# Altium PCB cybd18V1.2.3F.PcbDoc
Units mil, origin at the board's own origin, x right, y up, seen from the top; angles counter-clockwise.
Board outline 2090.52 x 2175.68 mil, 2 copper layers (Top Layer, Bottom Layer); 93 components, 98 nets, 339 pads, 70 vias.
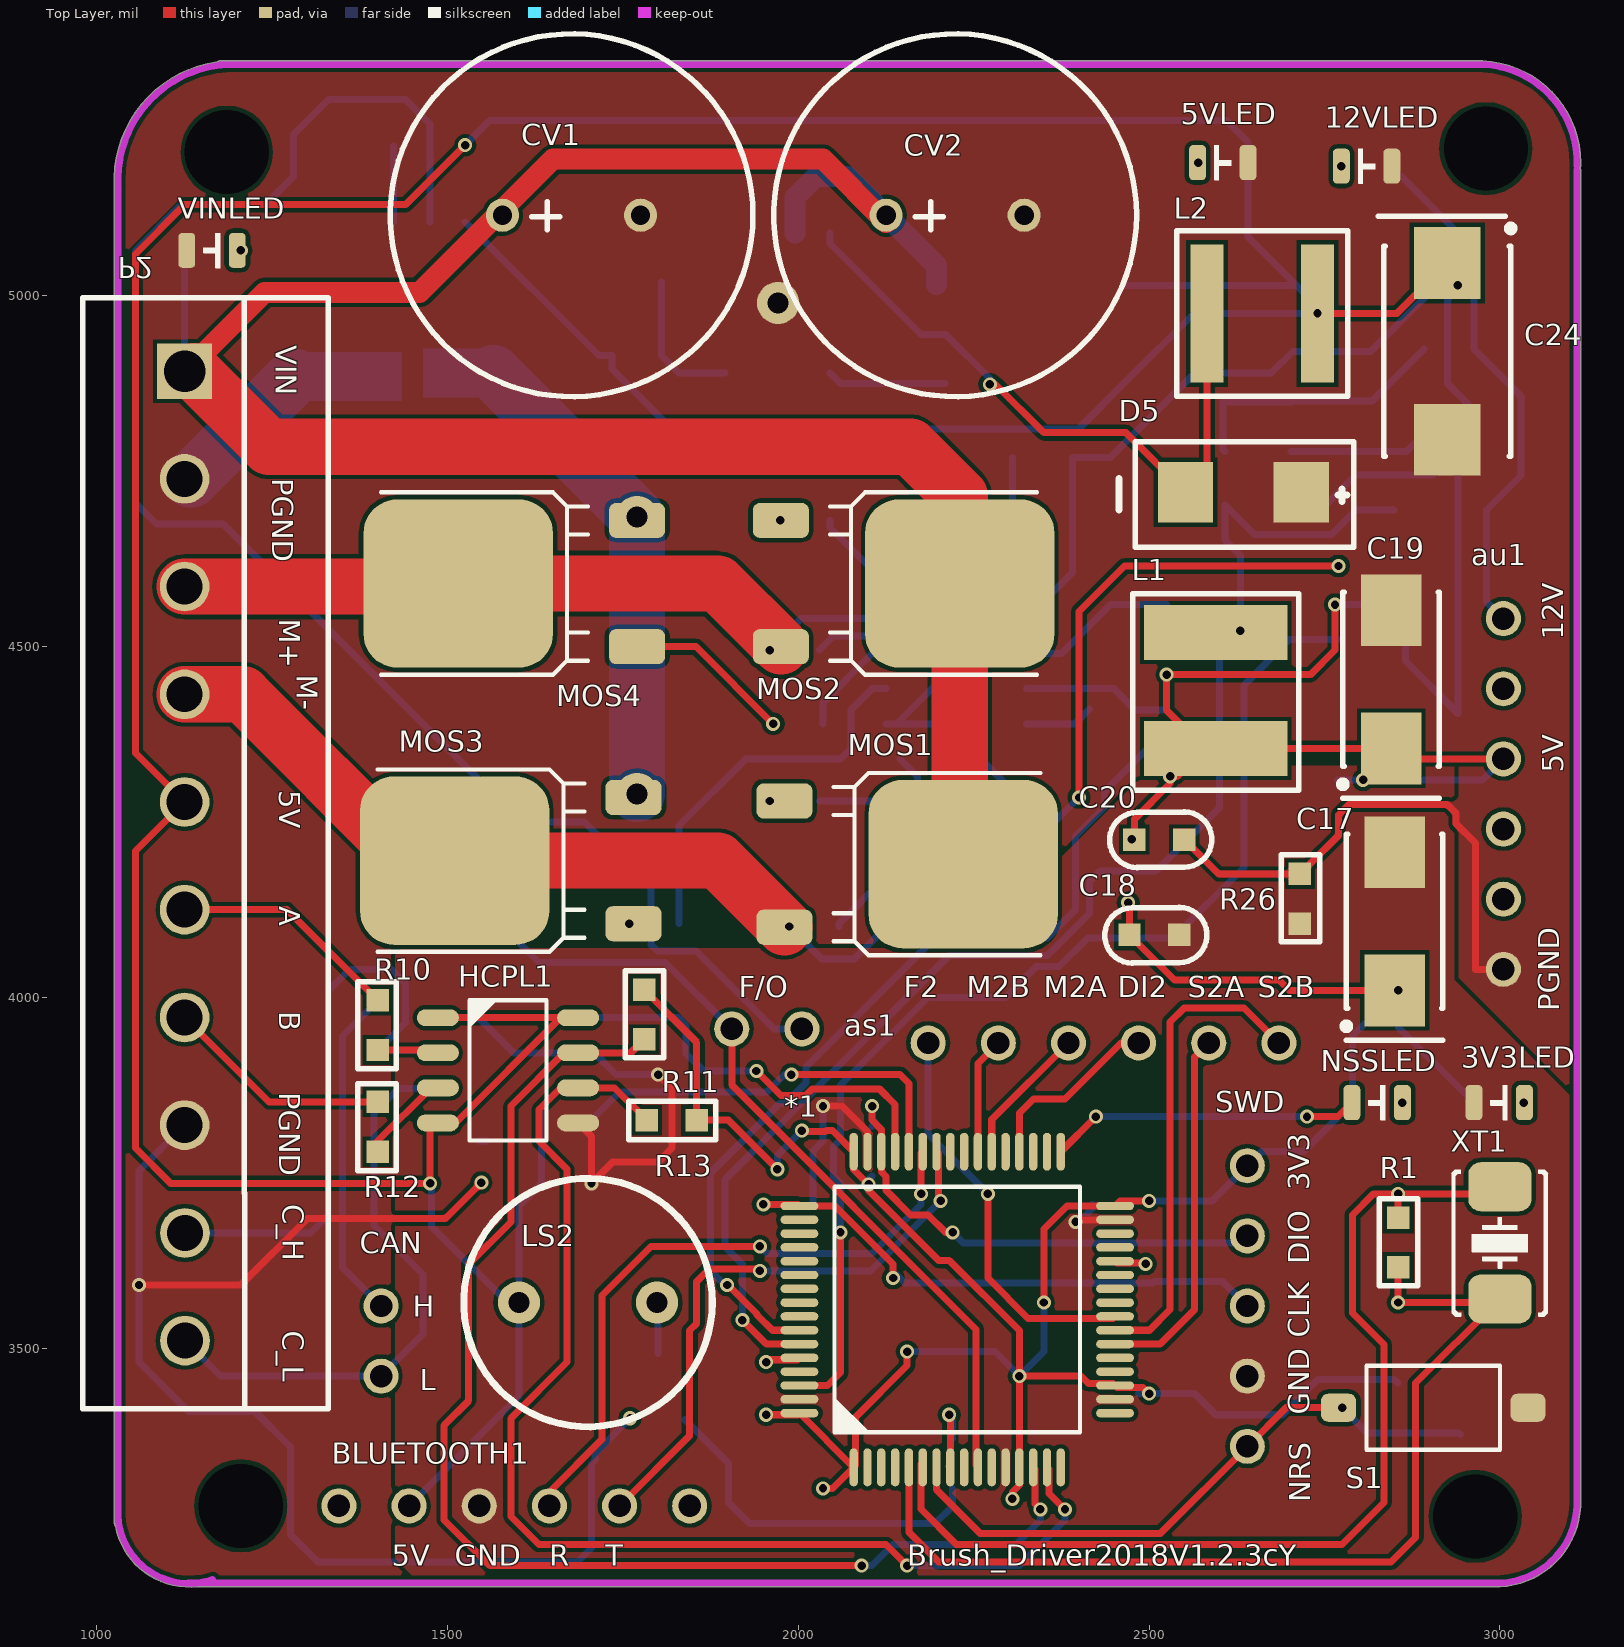
[diagram p0: Top Layer view]
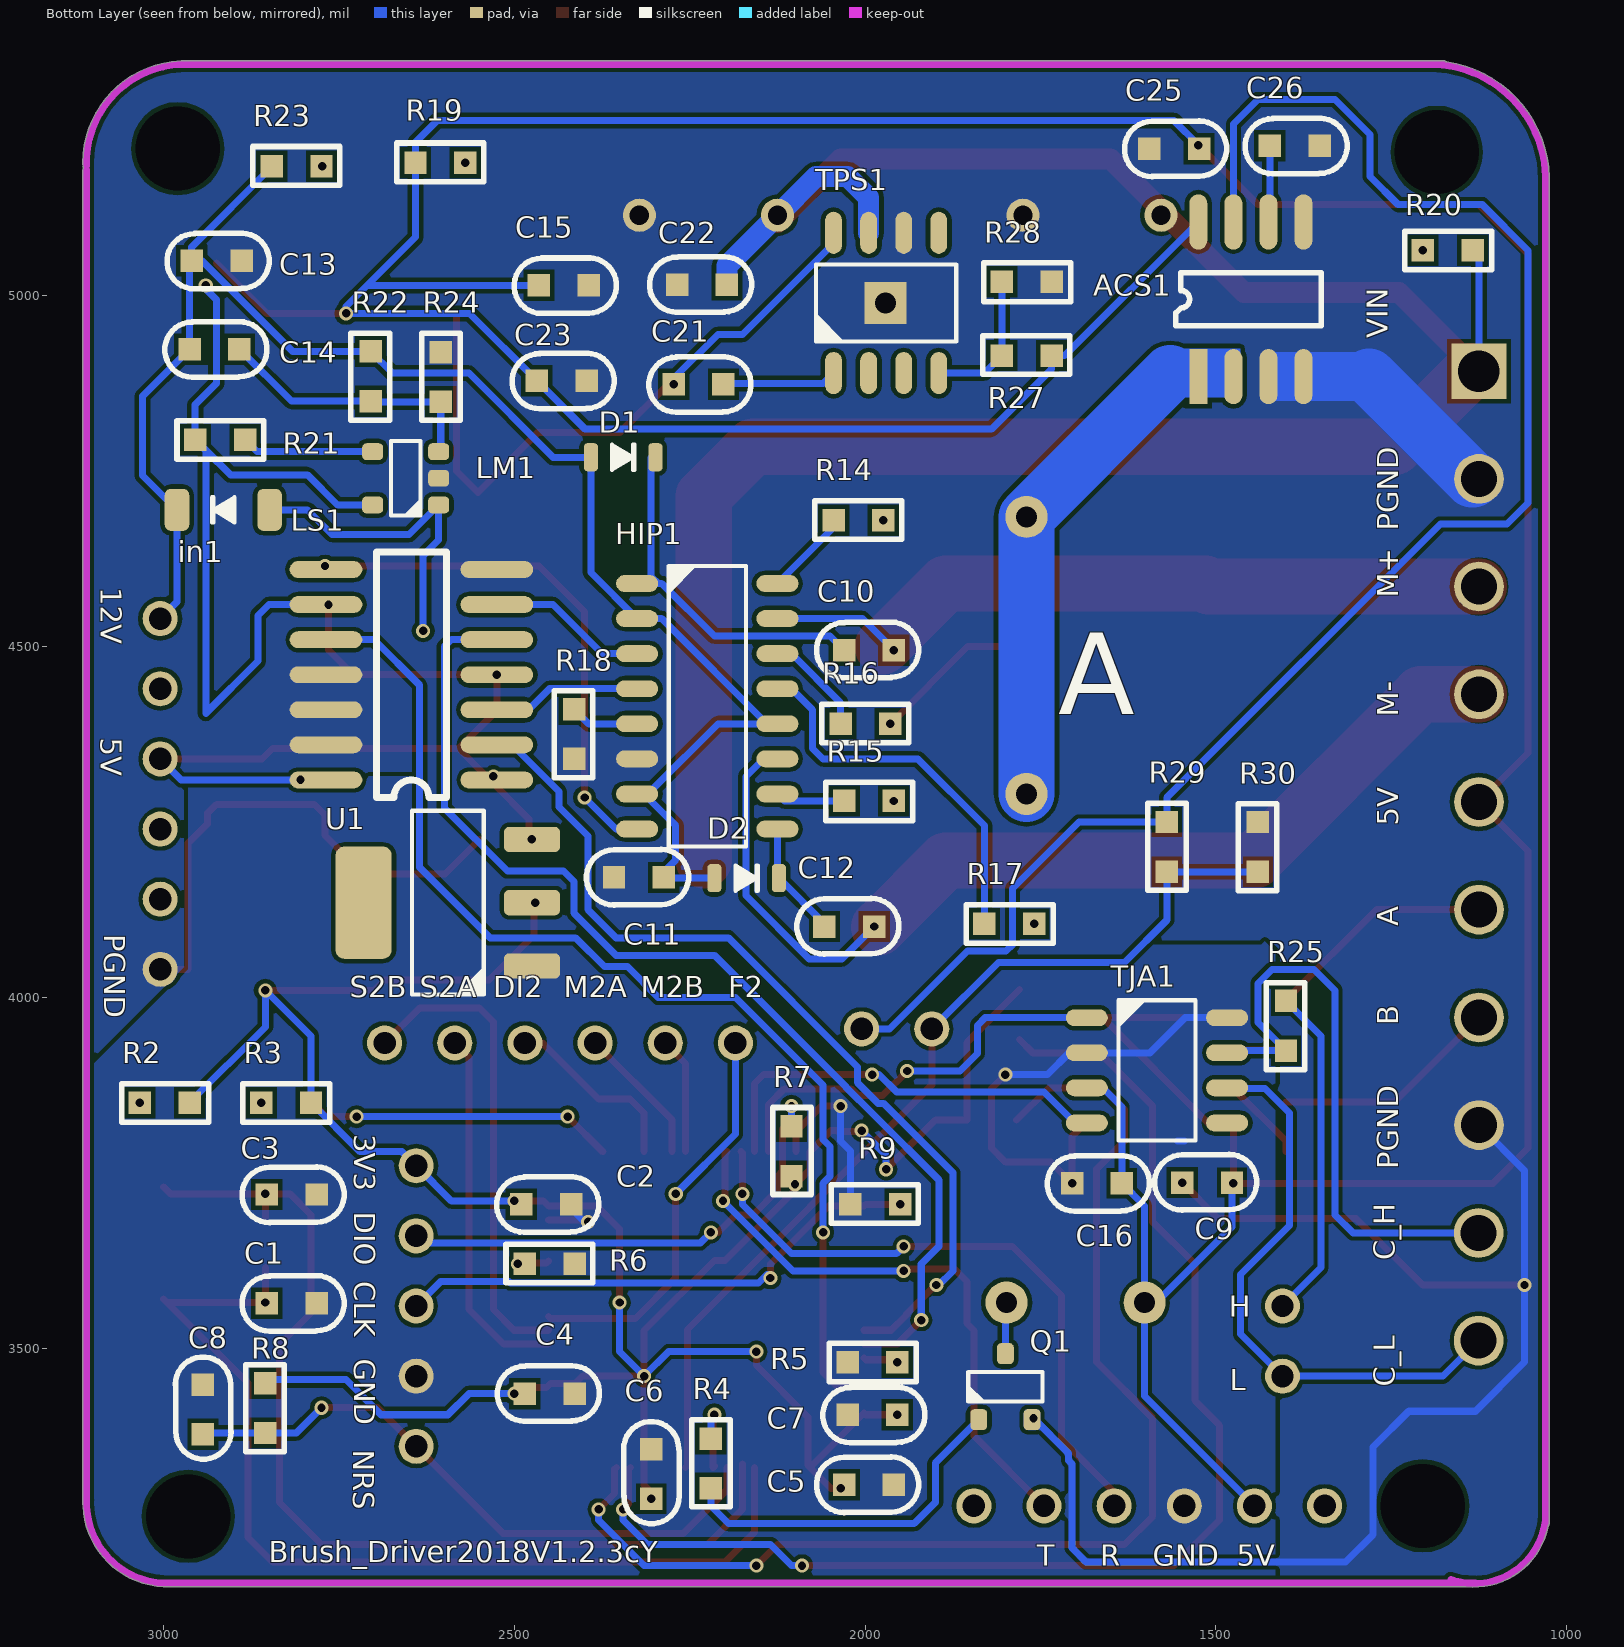
[diagram p1: Bottom Layer view, seen from below]
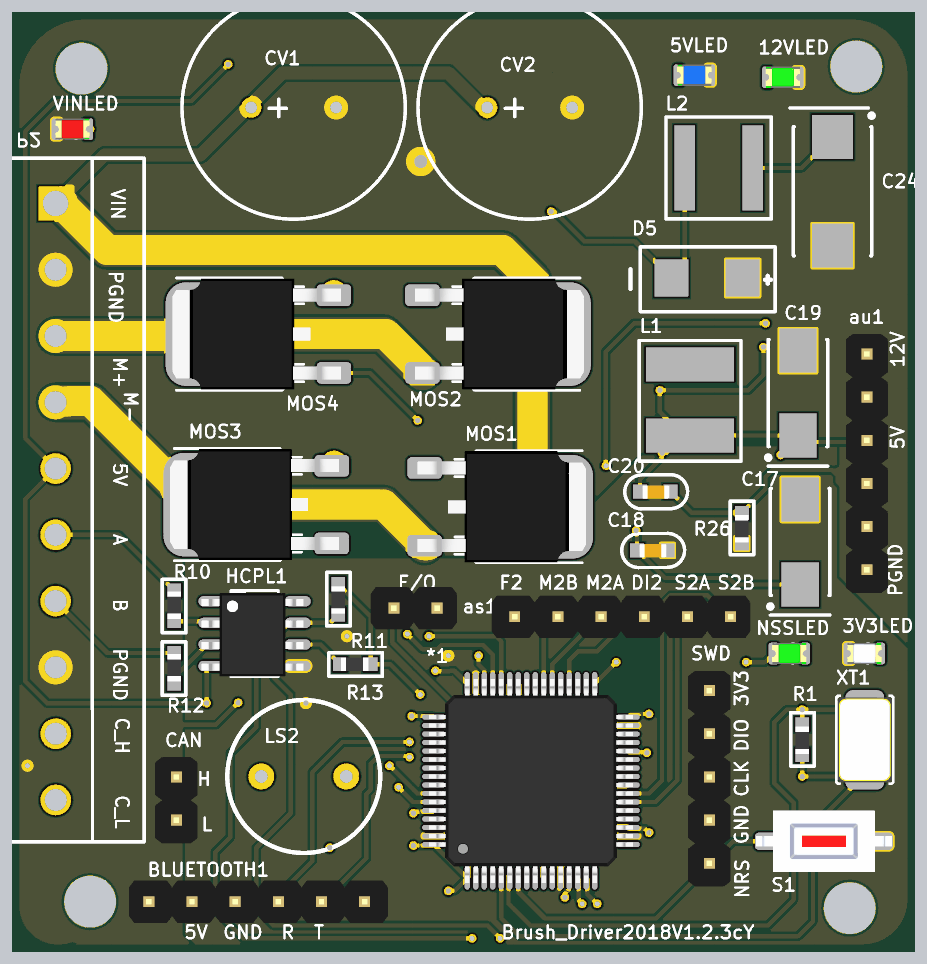
[diagram p2: 3D render of the assembled board from above, using the file's embedded part models]
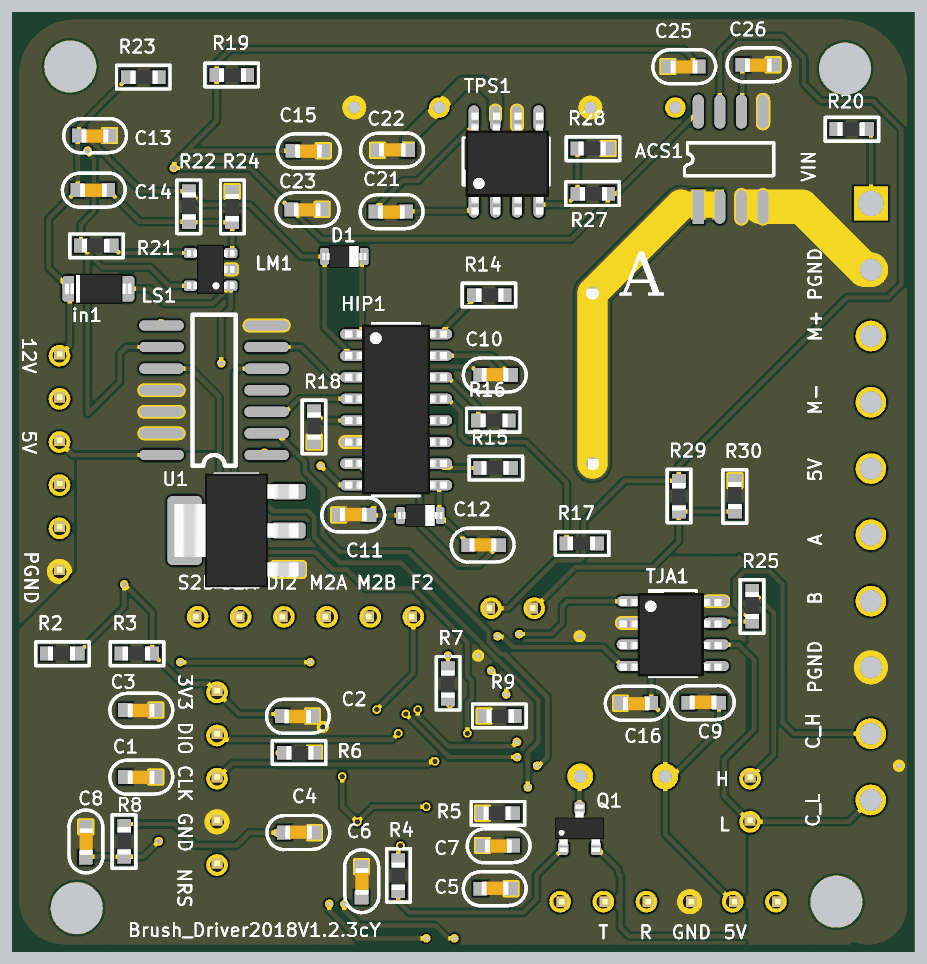
[diagram p3: 3D render of the assembled board from below, using the file's embedded part models]

## Layer stack, top to bottom
Top Solder: solder mask 0.4, Solder Resist, Dk 3.5
Top Layer: signal copper 1.4
Dielectric 1: dielectric 12.6, FR-4, Dk 4.8
Bottom Layer: signal copper 1.4
Bottom Solder: solder mask 0.4, Solder Resist, Dk 3.5

## Board outline
1026.45,3246.46 cw(c1030,3250) 1024.98,3250 1024.98,3257.24 cw(c1131.51,3266.23) 1024.98,3275.21 1024.98,5154.85 cw(c1195,5165) 1171.62,5333.71 cw(c1175,5330) 1175,5335.02 2975,5335.02 cw(c2975,5330) 2975.18,5335.01 cw(c2970,5190) 3115.1,5190 cw(c2970,5190) 3115.01,5184.82 cw(c3110,5185) 3114.35,5182.5 cw(c3110,5180) 3115.01,5180 3115.01,3285.11 cw(c2995,3280) 3115.12,3280 cw(c2995,3280) 3115.01,3274.78 cw(c2995,3280) 3000.22,3159.99 cw(c3000,3165) 3000,3159.99 1143.38,3159.99 cw(c1131.51,3266.23)

## Design rules (kind name [scope] priority, off if disabled: settings)
Clearance [All] p1: gap=6 ignorepadtopadclearanceinfootprint=FALSE
PolygonConnect [All] p1: connectstyle=Direct reliefconductorwidth=10 reliefentries=4 polygonreliefangle="90 Angle" airgapwidth=10
RoutingVias [All] p1: holewidth=12 width=20 viastyle="Through Hole" minholewidth=10 minwidth=20 maxholewidth=28 maxwidth=50
SolderMaskExpansion [All] p1: expansion=4
UnRoutedNet [All] p1: checkbadconnections=TRUE
Width [All] p1: maxlimit=100 minlimit=10 preferedwidth=10
29 further rules are at their usual default settings.

## Classes and differential pairs
component class 74ls08: LS1
component class cy18bd103: 3V3LED *1 BLUETOOTH BLUETOOTH1 C1 C2 C3 C4 C5 C6 C7 C8 LS2 NSSLED P1 Q1 R1 R2 R3 R4 R5 R6 R7 R8 R9 S1 SWD XT1
component class hcpl0630: C9 HCPL1 R10 R11 R12 R13
component class HIP4082driver: 5VLED as1 au1 C10 C11 C12 CV1 CV2 D1 D2 HIP1 MOS1 MOS2 MOS3 MOS4 P2 R14 R15 R16 R17 R18 R19 R20 VINLED
component class lm27313_5_12: 12VLED C13 C14 C15 in1 L1 LM1 R21 R22 R23 R24
component class taj1050: C16 CAN P3 R25 TJA1
component class tlv117_5_3.3: C17 C18 C19 C20 R26 U1
component class tps5430_VIN_5V: C21 C22 C23 C24 D5 L2 R27 R28 TPS1
component class 电流环: ACS1 C25 C26 C? F/O P?

## Components (designator, comment, footprint, x,y, rotation, side; value= is the part's Value field where it differs from the comment)
3V3LED "LED_0805blue" LED_0805_YELLOW 2999,3850 r180 top
5VLED "LED_0805" LED_0805_BLUE 2605,5190 r0 top
12VLED "LED_0805" LED_0805_GREEN 2810,5185 r0 top (schematic designator 2)
*1 "STM32F103RC" LQFP_P0.5_64 2226.42,3555 r90 top
ACS1 "ACS712" SOP8ACS712 1525,4885 r90 bottom
as1 "HDR1x6_2.54" HDR1X6_2.54_180 2685,3935 r270 top
au1 "HDR1x6_2.54" HDR1X6_2.54_180 3005,4540 r0 top
BLUETOOTH1 "HDR1x6_2.54" HDR1X6_2.54_180 1345,3275 r90 top
C1 "Cap_0603" CAP_0603 2815,3565 r0 bottom value=20pF
C2 "Cap_0603" CAP_0603 2452,3706 r0 bottom value=0.1uF
C3 "Cap_0603" CAP_0603 2815,3720 r0 bottom value=20pF
C4 "Cap_0603" CAP_0603 2452,3434 r180 bottom value=0.1uF
C5 "Cap_0603" CAP_0603 1997,3304 r180 bottom value=0.1uF
C6 "Cap_0603" CAP_0603 2306,3323 r270 bottom value=0.1uF
C7 "Cap_0603" CAP_0603 1987,3406 r0 bottom value=0.1uF
C8 "Cap_0603" CAP_0603 2945,3415 r270 bottom value=0.1uF
C9 "Cap_0603" CAP_0603 1515,3735 r180 bottom value=0.1uF
C10 "Cap_0603" CAP_0603 1997,4494 r180 bottom value=1uF
C11 "Cap_0603" CAP_0603 2325,4170 r180 bottom value=0.1uF
C12 "Cap_0603" CAP_0603 2025,4100 r180 bottom value=1uF
C13 "Cap_0603" CAP_0603 2922,5051 r0 bottom value=4.7uF
C14 "Cap_0603" CAP_0603 2925,4925 r0 bottom value=220pF
C15 "Cap_0603" CAP_0603 2427,5016 r0 bottom value=2.2uF
C16 "Cap_0603" CAP_0603 1667,3736 r0 bottom value=0.1uF
C17 "Cap_Tan_0805" CAP-TAN-6032/CAPC 2850,4010 r270 top value=100uF
C18 "Cap_0603" CAP_0603 2510,4090 r180 top value=0.1uF
C19 "Cap_Tan_0805" CAP-TAN-6032/CAPC 2845,4355 r270 top value=100uF
C20 "Cap_0603" CAP_0603 2517,4226 r180 top value=0.1uF
C21 "Cap_0603" CAP_0603 2235,4875 r0 bottom value=0.1uF
C22 "Cap_0603" CAP_0603 2235,5015 r180 bottom value=10uF
C23 "Cap_0603" CAP_0603 2430,4880 r0 bottom value=0.1uF
C24 "Cap_Tan_0805" CAP-TAN-7343/CAPD 2925,5046.97 r270 top value=220uF
C25 "Cap_0603" CAP_0603 1557,5211 r0 bottom value=0.1uF
C26 "Cap_0603" CAP_0603 1385,5215 r0 bottom value=1nF
CAN "HDR1x2_2.54" HDR1X2_2.54_180 1405,3560 r0 top (schematic designator P3)
CV1 "680uF" CAP_ELE_680UF0.7X5MM 1775,5115 r180 top value=*μF
CV2 "680uF" CAP_ELE_680UF0.7X5MM 2321.85,5115 r180 top value=*μF
D1 "Din5819" SOD-323 2345,4770 r180 bottom
D2 "Din5819" SOD-323 2169,4170 r180 bottom
D5 "dio_ss34" dio_ss34 2635,4720 r180 top
F/O "HDR1x2_2.54" HDR1X2_2.54_180 2005,3955 r270 top (schematic designator P4)
HCPL1 "HCPL0630" SOP_E150_8 1585,3895 r0 top
HIP1 "hip4082" SOP_E150_16 2225,4415 r180 bottom
in1 "SchottkyDiode_SOD123" SOD-123 2915,4695 r0 bottom value=B?
L1 "" indmm5x2_2_2 2595,4441.26 r90 top value=10uH
L2 "Ind_0603" indmm5x1.2x4x5 2661.26,4975 r0 top value=47H
LM1 "LM27313" SOT23-5 2655,4740 r0 bottom
LS1 "74LS08" SOP14 2536.81,4310 r0 bottom
LS2 "Bell" Bell-5.6-0.6-9mm 1700,3565 r0 top
MOS1 "MOSFET_N" TO-252AA 1980,4280 r270 top value=NMOS?
MOS2 "MOSFET_N" TO-252AA 1975,4680 r270 top value=NMOS?
MOS3 "MOSFET_N" TO-252AA 1765,4105 r90 top value=NMOS?
MOS4 "MOSFET_N" TO-252AA 1770,4500 r90 top value=NMOS?
NSSLED "LED_0805green" LED_0805_GREEN 2825,3850 r180 top
P2 "Header 10" Green_10P 1125,4885.63 r270 top
Q1 "BJT_NPN" SOT23-3 1800,3445 r90 bottom
R1 "Res_0603" RES_0603 2937,3649 r270 top value=1M
R2 "Res_0603" RES_0603 3000,3768 r0 bottom value=10K
R3 "Res_0603" RES_0603 2827,3768 r0 bottom value=10K
R4 "Res_0603" RES_0603 2138,3334 r270 bottom value=1K
R5 "Res_0603" RES_0603 1991,3398 r0 bottom value=10K
R6 "Res_0603" RES_0603 2448,3702 r180 bottom value=10K
R7 "Res_0603" RES_0603 2023,3779 r270 bottom value=10K
R8 "Res_0603" RES_0603 2937,3416 r90 bottom value=10K
R9 "Res_0603" RES_0603 1984,3787 r180 bottom value=10K
R10 "Res_0603" RES_0603 1318,3962 r90 top value=500
R11 "Res_0603" RES_0603 1862,3974 r270 top value=2k
R12 "Res_0603" RES_0603 1318,3817 r90 top value=500
R13 "Res_0603" RES_0603 1818,3743 r180 top value=2k
R14 "Res_0603" RES_0603 2008,4762 r180 bottom value=10K
R15 "Res_0603" RES_0603 1996,4198 r0 bottom value=10K
R16 "Res_0603" RES_0603 1998,4472 r180 bottom value=10K
R17 "Res_0603" RES_0603 1796,4023 r0 bottom value=10K
R18 "Res_0603" RES_0603 2497,4377 r90 bottom value=10K
R19 "Res_0603" RES_0603 2604,5272 r180 bottom value=10K
R20 "Res_0603" RES_0603 1171,4983 r0 bottom value=10K
R21 "Res_0603" RES_0603 2921,4713 r0 bottom value=10K
R22 "Res_0603" RES_0603 2787,4887 r90 bottom value=10K
R23 "Res_0603" RES_0603 2809,5267 r180 bottom value=10K
R24 "Res_0603" RES_0603 2523,4883 r270 bottom value=1K
R25 "Res_0603" RES_0603 1482,3961 r90 bottom value=120
R26 "Res_0603" RES_0603 2797,4139 r270 top value=0
R27 "Res_0603" RES_0603 1768,4997 r180 bottom value=10K
R28 "Res_0603" RES_0603 1771,4938 r0 bottom value=3.3K
R29 "Res_0603" RES_0603 1488,4213 r270 bottom value=10K
R30 "Res_0603" RES_0603 1522,4216 r90 bottom value=10K
S1 "ButtonTACT_3x6x2.5_180" ButtonTACT_3x6x2.5_180 2905,3415 r0 top
SWD "HDR1x5_2.54" HDR1X5_2.54_180 2640,3760 r0 top (schematic designator P1)
TJA1 "TJA1050" SOP_E150_8 1585,3895 r180 bottom
TPS1 "TPS5430" SOP_E150_9 1970,4990 r90 bottom
U1 "tlv1117-3.3" SOT223-3 2595,4135 r90 bottom
VINLED "LED_0805" LED_0805_RED 1164,5065 r180 top
XT1 "XTAL_32.768kHz" XT_5032_2 3000,3650 r270 top value=8M

## Footprints (in the part's own frame and the unit in brackets; to place one, negate y for a bottom-side part, rotate by r counter-clockwise, add the part's x,y. Pads: shape width x height; smd on the part's side, far side on the other; paste and mask are expansions set on the pad)
Bell-5.6-0.6-9mm [mil]
  round 60 hole 30: 1(-98.43,0) 2(98.43,0)
  silkscreen extent -177,-177 177,177
ButtonTACT_3x6x2.5_180 [mil]
  rrect50% 50x40 smd: 1(-135,0) 2(135,0)
  silkscreen extent -95,-60 95,60, body extent -157,-71 157,71, height 94
CAP-TAN-6032/CAPC [mm]
  rect 2.6x2.2 smd: 1(0,0) 2(-5,0)
  silkscreen extent -5.65,-1.87 1.8,1.75
CAP-TAN-7343/CAPD [mm]
  rect 2.6x2.4 smd: 1(0,0) 2(6.4,0)
  silkscreen extent -1.7,-2.5 7,2.43
CAP_0603 [mil]
  rect 32x32 smd: 1(-33,1) 2(38,1)
  silkscreen extent -72,-38 73,41, body extent -30,-14 33,18, height 31
CAP_ELE_680UF0.7X5MM [mm]
  round 1.2 hole 0.7: 1(5,0) 2(0,0)
  silkscreen extent -4.07,-6.57 9.07,6.57
dio_ss34 [mm]
  rect 2x2.2 smd: 1(-2.083,0) 2(2.108,0)
  silkscreen extent -3.99,-1.83 4.52,1.98
Green_10P [mm]
  rect 2x2 hole 1.5: 1(-0.18,0)
  round 1.8 hole 1.3: 2(3.72,0) 3(7.62,0) 4(11.52,0) 5(15.42,0) 6(19.32,0) 7(23.22,0) 8(27.12,0) 9(31.025,0.01) 10(34.925,0.01)
  silkscreen extent -2.85,-3.68 37.39,5.21
HDR1X2_2.54_180 [mil]
  round 50 hole 32: 1(0,0) 2(0,-100)
  body extent -49,-150 49,50, height 323
HDR1X5_2.54_180 [mil]
  round 50 hole 32: 1(0,0) 2(0,-100) 3(0,-200) 4(0,-300) 5(0,-400)
  body extent -49,-450 49,50, height 323
HDR1X6_2.54_180 [mil]
  round 50 hole 32: 1(0,0) 2(0,-100) 3(0,-200) 4(0,-300) 5(0,-400) 6(0,-500)
  body extent -49,-550 49,50, height 323
indmm5x1.2x4x5 [mm]
  rect 1.2x5 smd: 1(-2,0) 2(2,0)
  silkscreen extent -3.1,-3 3.1,3
indmm5x2_2_2 [mm]
  rect 2x5.2 smd: 1(-2.2,0) 2(2,0)
  silkscreen extent -3.7,-3 3.4,3
LED_0805_BLUE [mil]
  rrect50% 24x50 smd: 1(-36,0) 2(36,0)
  silkscreen extent -12,-24 12,24, body extent -40,-25 40,25, height 43
LED_0805_GREEN [mil]
  rrect50% 24x50 smd: 1(-36,0) 2(36,0)
  silkscreen extent -12,-24 12,24, body extent -40,-25 40,25, height 43
LED_0805_RED [mil]
  rrect50% 24x50 smd: 1(-36,0) 2(36,0)
  silkscreen extent -12,-24 12,24, body extent -40,-25 40,25, height 43
LED_0805_YELLOW [mil]
  rrect50% 24x50 smd: 1(-36,0) 2(36,0)
  silkscreen extent -12,-24 12,24, body extent -40,-25 40,25, height 43
LQFP_P0.5_64 [mil]
  oval 54x12 smd: 1(-225,147.64) 2(-225,127.95) 3(-225,108.27) 4(-225,88.58) 5(-225,68.9) 6(-225,49.21) 7(-225,29.53) 8(-225,9.84) 9(-225,-9.84) 10(-225,-29.53) 11(-225,-49.21) 12(-225,-68.9) 13(-225,-88.58) 14(-225,-108.27) 15(-225,-127.95) 16(-225,-147.64) 33(225,-147.64) 34(225,-127.95) 35(225,-108.27) 36(225,-88.58) 37(225,-68.9) 38(225,-49.21) 39(225,-29.53) 40(225,-9.84) 41(225,9.84) 42(225,29.53) 43(225,49.21) 44(225,68.9) 45(225,88.58) 46(225,108.27) 47(225,127.95) 48(225,147.64)
  oval 12x54 smd: 17(-147.64,-225) 18(-127.95,-225) 19(-108.27,-225) 20(-88.58,-225) 21(-68.9,-225) 22(-49.21,-225) 23(-29.53,-225) 24(-9.84,-225) 25(9.84,-225) 26(29.53,-225) 27(49.21,-225) 28(68.9,-225) 29(88.58,-225) 30(108.27,-225) 31(127.95,-225) 32(147.64,-225) 49(147.64,225) 50(127.95,225) 51(108.27,225) 52(88.58,225) 53(68.9,225) 54(49.21,225) 55(29.53,225) 56(9.84,225) 57(-9.84,225) 58(-29.53,225) 59(-49.21,225) 60(-68.9,225) 61(-88.58,225) 62(-108.27,225) 63(-127.95,225) 64(-147.64,225)
  silkscreen extent -175,-175 175,175, body extent -236,-236 236,236, height 59
RES_0603 [mil]
  rect 32x32 smd: 1(-37,-82) 2(34,-82)
  silkscreen extent -64,-109 60,-54, body extent -31,-98 31,-66, height 18
SOD-123 [mil]
  rrect50% 35x60 smd: 1(-66,0) 2(66,0)
  silkscreen extent -16,-18 16,18, body extent -77,-35 77,35, height 46
SOD-323 [mil]
  rrect50% 20x40 smd: 1(-46,0) 2(46,0)
  silkscreen extent -16,-18 16,18, body extent -51,-27 51,27, height 43
SOP8ACS712 [mm]
  rect 2x0.65 smd: 1(0,0)
  oval 2x0.65 smd: 2(0,-1.27) 3(0,-2.54) 4(0,-3.81) 5(5.6,-3.81) 6(5.6,-2.54) 7(5.6,-1.27) 8(5.6,0)
  silkscreen extent 1.84,-4.44 3.77,0.81
SOP14 [mil]
  oval 103.62x24 smd: 1(-11.81,0) 2(-11.81,-50) 3(-11.81,-100) 4(-11.81,-150) 5(-11.81,-200) 6(-11.81,-250) 7(-11.81,-300) 8(231.81,-300) 9(231.81,-250) 10(231.81,-200) 11(231.81,-150) 12(231.81,-100) 13(231.81,-50) 14(231.81,0)
  silkscreen extent 60,-325 160,25
SOP_E150_8 [mil]
  oval 60x24 smd: 1(-99,76) 2(-99,26) 3(-99,-24) 4(-99,-74) 5(101,-74) 6(101,-24) 7(101,26) 8(101,76)
  silkscreen extent -54,-99 56,101, body extent -122,-98 114,95, height 69
SOP_E150_9 [mil]
  oval 60x24 smd: 1(-100,75) 2(-100,25) 3(-100,-25) 4(-100,-75) 5(100,-75) 6(100,-25) 7(100,25) 8(100,75)
  rect 60x60 smd: 9(0,1)
  silkscreen extent -55,-100 55,100, body extent -123,-99 113,94, height 69
SOP_E150_16 [mil]
  oval 60x24 smd: 1(-100,175) 2(-100,125) 3(-100,75) 4(-100,25) 5(-100,-25) 6(-100,-75) 7(-100,-125) 8(-100,-175) 9(100,-175) 10(100,-125) 11(100,-75) 12(100,-25) 13(100,25) 14(100,75) 15(100,125) 16(100,175)
  silkscreen extent -55,-200 55,200, body extent -118,-197 118,197, height 69
SOT23-3 [mil]
  rrect50% 30x24 smd: 1(-47,38) 2(-47,-38) 3(47,0)
  silkscreen extent -21,-53 21,53, body extent -55,-57 55,57, height 51
SOT23-5 [mil]
  rrect50% 30x24 smd: 1(-47,38) 2(-47,0) 3(-47,-38) 4(47,-38) 5(47,38)
  silkscreen extent -21,-53 21,53, body extent -55,-57 55,57, height 57
SOT223-3 [mil]
  rrect40% 36x80 smd: 1(-90.16,-120) 2(0,-120) 3(90.16,-120)
  rrect30% 160x80 smd: 4(0,120)
  silkscreen extent -131,-51 131,51, body extent -132,-144 132,144, height 71
TO-252AA [mil]
  rrect40% 50x80 smd: 1(0,0) 3(180,0)
  rrect40% 240x270 smd: 4(90,255)
  silkscreen extent -40,70 220,365, body extent -39,-17 219,374, height 91
XT_5032_2 [mil]
  rrect50% 70x90 smd: 1(-80,0) 2(80,0)
  silkscreen extent -105,-69 105,69, body extent -98,-63 98,63, height 39

## Part data
3V3LED NSSLED: library part LED_0805, "LED"
5VLED 12VLED VINLED: library part LED_0603, "LED"
*1: "MCU"
ACS1: "Sensor Current"
as1 au1 BLUETOOTH1 CAN F/O SWD: "Header"
C1 C2 C3 C4 C5 C6 C7 C8 C9 C10 C11 C12 C13 C14 C15 C16 C17 C18 C19 C20 C21 C22 C23 C24 C25 C26: "Capacitor"
CV1 CV2: library part CAP-ELE, "电解电容", LatestRevisionDate=17-Jul-2002, LatestRevisionNote="Re-released for DXP Platform.", PackageDescription="Polarized Capacitor (Radial); 2 Leads", PackageReference=RB7.6-15, Published=8-Jun-2000, Publisher="Altium Limited"
D1 D2: library part Diode, "Diode"
in1: "Diode"
L1: library part Ind_0603, "Inductor"
L2: "Inductor"
LS2: "Electrical Bell", LatestRevisionDate=17-Jul-2002, LatestRevisionNote="Re-released for DXP Platform.", PackageReference=PIN2, Published=24-Mar-1999, Publisher="Altium Limited"
MOS1 MOS2 MOS3 MOS4: "MOSFET"
P2: "Header, 10-Pin", LatestRevisionDate=17-Jul-2002, LatestRevisionNote="Re-released for DXP Platform.", Publisher="Altium Limited"
Q1: "Transistor"
R1 R2 R3 R4 R5 R6 R7 R8 R9 R10 R11 R12 R13 R14 R15 R16 R17 R18 R19 R20 R21 R22 R23 R24 R25 R26 R27 R28 R29 R30: "Resistor"
S1: "Button"
TJA1: "CAN总线收发器"
U1: library part LM1117IMP-5.0, "800mA Low-Dropout Linear Regulator", DigiKeyPartNumber=LM1117IMP-5.0CT-ND, Manufacturer="National Semiconductor", PackageTopMarking=XYTT*N06B, PowerWise=N, Code_IPC=SOT223-4, Code_JEDEC=TO-261-AA, ComponentLink1Description="LM1117 Datasheet", ComponentLink1URL=http://www.national.com/ds/LM/LM1117.pdf, ComponentLink2Description="LM1117 Web Page", ComponentLink2URL=http://www.national.com/pf/LM/LM1117.html, ComponentLink3Description="MP04A Package Page", ComponentLink3URL=http://www.national.com/packaging/folders/mp04a.html, CompType="LDO IC", DatasheetVersion=Apr-2006, PackageDescription="Molded SOT-223, 6.50 x 3.56 x 1.6mm Body, 4 Lead, 2.3mm Pitch", PackageReference=MP04A, PackageVersion="revB, Apr-2003", PartNumber=LM1117IMP-5.0, PinCount=4, Published=4-Dec-2008, Publisher="Altium Limited", RoHS=O
XT1: library part XTAL_32.768k, "Crystal Oscillator"

## Free pads (board coordinates)
  round 60 hole 30: 18(1770,4685) 19(1770,4290) 24(1971,4990)
  round 60 hole 120: 20(1185,5205) 21(2980,5210) 22(2965,3260) 23(1205,3275)

## Via types
v1: diameter 20, hole 12, Top Layer to Bottom Layer, 70 vias

## Nets (pads, with @x,y where several pads share a name; then routed paths per layer and width w, separated by ;. In a path a pad name is that pad's centre, name@x,y a point inside that pad or via, vN(x,y) a via of type N, cw(c..) or ccw(c..) an arc to the next point about the centre after c; other vN are vias at no path point)
3V3: *1.1 *1.13 *1.19 *1.32 *1.48 *1.64 C2.2 C4.1 C5.1 C6.2 C7.1 C17.1 C18.2 R2.1 R3.1 R7.2 R8.2 R11.1 R13.1 SWD.1 U1.2 | length 3910.9
  Top Layer w10: R11.1 1855,3936 R13.1 1900,3825 v1(1970,3755) ; v1(1954,3405) 1999.06,3405 *1.64 *1.1 ; v1(2005,3810) 2006,3809 2038.7,3809 2039.7,3810 2048.78,3810 *1.48 2078.78,3754.64 v1(2100,3733.42) 2100,3725 2200,3625 2215,3625 2315,3525 v1(2315,3460) ; v1(2035,3300) 2048.78,3300 *1.1 ; v1(2155,3495) 2155,3475 2081.46,3401.46 2081.46,3332.69 *1.1 ; v1(2305,3285) 2305,3294.64 2315,3304.64 *1.13 v1(2315,3460) ; v1(2350,3565) 2350,3670 2382.64,3702.64 *1.32 2458.78,3710 v1(2500,3710) ; v1(2470,4135) 2472,4133 C18.2 2536,4025 2685,4025 2700,4010 C17.1 ; v1(2500,3435) 2490.95,3444.05 2454.1,3444.05 *1.19 2448.73,3449.42 2413.42,3449.42 2402.83,3460 v1(2315,3460)
  Bottom Layer w10: v1(1970,3755) 1970,3775 v1(2005,3810) ; v1(2100,3733.42) 2100,3740 R7.2 ; v1(2155,3495) 2280,3495 v1(2315,3460) 2350,3495 v1(2350,3565) ; C4.1 2565,3435 2595,3405 2690,3405 2740,3455 2850,3455 R8.2 ; v1(2500,3710) 2590,3710 SWD.1 2660,3780 2720,3780 R3.1 2790,3945 v1(2855,4010) 2855,3958 R2.1
5V: ACS1.8 au1.3 BLUETOOTH1.2 C9.2 C15.2 C16.1 C19.1 C20.2 C23.2 C24.1 C25.1 HCPL1.1 HCPL1.4 HCPL1.8 L1.1 L2.2 LM1.5 LS1.1 LS1.4 LS1.9 LS1.14 LS2.1 P2.5 R19.1 R21.2 R27.2 TJA1.3 U1.3 | length 9565.4
  Top Layer w10: HCPL1.1 HCPL1.8@1661,3971 ; v1(1525,5215) 1440,5130 1125,5130 1055,5060 1055,4348.54 P2.5 1055,4208.54 1055,3785 1105,3735 v1(1475,3735) 1475,3810 HCPL1.4 1511,3821 HCPL1.8@1661,3971 ; HCPL1.8 HCPL1.8@1661,3971 ; C20.2 2479,4254 2530,4305 v1(2530,4315) 2540,4315 L1.1@2579.65,4354.65 ; v1(2740,4975) 2853.03,4975 C24.1 ; v1(2765,4560) 2765,4495 2730,4460 v1(2525,4460) 2525,4409.29 L1.1@2579.65,4354.65 ; au1.3 2860,4340 C19.1 2595.35,4355 L1.1 L1.1@2579.65,4354.65
  Bottom Layer w10: BLUETOOTH1.2 1601.57,3431.57 LS2.1 ; C9.2 1477,3673 1585,3565 LS2.1 ; ACS1.8 1715.47,4915 R27.2 1734,4896 1820,4810 2399,4810 C23.2 2564,4975 v1(2740,4975) 2740,4985 2710,5015 ; v1(1525,5215) 1560,5250 2610,5250 2641,5219 R19.1 2641,5084 2710,5015 ; TJA1.3 1661,3871 1634,3844 C16.1 1601.57,3702.57 LS2.1 ; C15.2 2710,5015 ; LM1.5 2752,4702 2795,4745 2905,4745 R21.2@2940,4780 ; LS1.14 v1(2805,4310) 2975,4310 au1.3 ; LS1.9 2850,4560 2865.47,4544.53 2865.47,4479.53 2940,4405 R21.2@2940,4780 ; v1(2940,5015) 2940,5010 2925,4995 2925,4875 2955,4845 R21.2 R21.2@2940,4780
  other v1: 2475,4225.16
12V: au1.1 C11.2 C13.2 C14.2 D1.1 D2.1 HIP1.2 HIP1.7 HIP1.12 in1.2 R22.2 R23.1 | length 2359.6
  Bottom Layer w10: HIP1.12 HIP1.12@2140,4390 ; D2.1 2286,4170 2286,4180 2270,4196 2270,4245 HIP1.7@2305,4280 ; HIP1.7@2302.5,4297.5 2210,4390 HIP1.12@2140,4390 ; R23.1@2845,5185 2960,5070 C13.2 ; au1.1 2981,4564 in1.2 3030,4744 3030,4857 C14.2 2963,5047 C13.2 ; HIP1.12@2140,4390 2290,4540 HIP1.2 2325.53,4540 2391,4605.47 D1.1 2445,4770 2565,4890 2674,4890 R22.2 2816,4921 2945,5050 C13.2
BOOT0: *1.60 R5.1 | length 49.9
  Top Layer w10: v1(1954,3480) 1957.42,3483.42 1998.73,3483.42 *1.60
BOOT1: *1.28 R6.1 | length 45.2
  Top Layer w10: *1.28 2454.1,3621.21 2493.79,3621.21 v1(2495,3620)
CAN_H: P2.9 R25.1 TJA1.7 | length 863.8
  Bottom Layer w10: P2.9 1304.19,3664.19 1330,3690 1330,4010 1360,4040 1420,4040 1440,4020 1440,3964 R25.1 1481,3924 TJA1.7
CAN_L: CAN.2 P2.10 TJA1.6 | length 833.3
  Bottom Layer w10: P2.10 1176.06,3460 CAN.2 1465,3520 1465,3605 1395,3675 1395,3835 1430,3870 1483,3870 TJA1.6
CAN_RX: *1.44 TJA1.4 | length 604.8
  Top Layer w10: v1(1990,3890) 2145,3890 2157.52,3877.48 *1.44
  Bottom Layer w10: TJA1.4 1701,3821 1745,3865 1955,3865 1980,3890 v1(1990,3890)
CAN_TX: *1.45 TJA1.1 | length 603.8
  Top Layer w10: v1(1940,3895) 1975,3860 2010.3,3860 2020,3869.7 2115.3,3869.7 2137.83,3847.17 *1.45
  Bottom Layer w10: TJA1.1 1829,3971 1840,3960 1840,3920 1865,3895 v1(1940,3895)
DIS: *1.62 LS1.10 | length 1608.4
  Top Layer w10: *1.62 2041.73,3446.73 2060,3465 v1(2060,3665)
  Bottom Layer w10: v1(2060,3665) 2060,3735 2050,3745 2050,3787.37 2060,3797.37 2060,3875 2185,4000 2295,4000 2339,4044 2371.63,4044 2412.63,4085 2535,4085 2635,4185 2635,4445 2700,4510 LS1.10
DIS2: *1.36 as1.3 | length 266.4
  Top Layer w10: *1.36 2315,3835 2335,3855 2380,3855 2460,3935 as1.3
DISIN: HIP1.8 LS1.8 | length 755.6
  Top Layer w10: v1(2400,4285) 2400,4550 2465,4615 v1(2770,4615)
  Bottom Layer w10: HIP1.8 2355,4240 v1(2400,4285)
GND: 3V3LED.2 *1.12 *1.18 *1.31 *1.47 *1.63 BLUETOOTH1.3 C1.1 C2.1 C3.1 C4.2 C5.2 C6.1 C7.2 C8.1 C16.2 C17.2 C18.1 HCPL1.5 R5.2 R6.2 R9.1 R26.2 S1.2 SWD.4 TJA1.2 TJA1.8 U1.1 | length 1064
  Top Layer w10: HCPL1.5@1699,3821 HCPL1.5 1705,3802 v1(1705,3735) 1735,3765 1800,3765 1820,3785 1820,3870 v1(1800,3890) ; v1(2035,3845) 2062.37,3845 2098.46,3808.91 *1.47 ; v1(2395,3680) 2397.95,3682.95 *1.31
  Bottom Layer w10: TJA1.8 1544,3971 1594,3921 TJA1.2 1709,3921 1740,3890 v1(1800,3890) ; 1545,3795 1555,3795 ; R9.1 2021,3781 2035,3795 v1(2035,3845) ; v1(2395,3680) 2400,3680 2419,3699 C2.1
LED1: *1.30
LED2: *1.29
MOT+: C10.2 HIP1.15 MOS2.3 MOS4.4 P2.3 | length 1073.7
  Top Layer w10: MOS4.4@1510.63,4585.63 MOS4.4
  Top Layer w80: P2.3 MOS4.4@1510.63,4585.63 ; MOS4.4 1885,4590 MOS2.3
  Bottom Layer w10: v1(1959,4495) 2004,4540 HIP1.15
MOT-: C12.2 HIP1.11 MOS1.3 MOS3.4 P2.4 | length 1437.2
  Top Layer w80: P2.4 1207.91,4432.09 1445,4195 MOS3.4 1885,4195 MOS1.3
  Bottom Layer w10: v1(1987,4101) 2033,4055 2080,4055 2170,4145 2170,4315 HIP1.11@2145,4340
Net3V3LED_1: 3V3LED.1 R2.2
  other v1: 3034,3850
Net5VLED_1: 5VLED.1 R19.2
  other v1: 2570,5190
Net12VLED_1: 12VLED.1 R23.2
  other v1: 2774,5185
NetACS1_6: ACS1.6 C26.2 | length 108.5
  Bottom Layer w10: ACS1.6@1423,5105.47 C26.2
NetC10_1: C10.1 D1.2 HIP1.1 | length 518.5
  Bottom Layer w10: C10.1 2050,4515 2215,4515 2290,4590 HIP1.1@2295,4590 ; D1.2@2305,4770 2305,4600 HIP1.1@2295,4590 ; HIP1.1 HIP1.1@2295,4590
NetC12_1: C12.1 D2.2 HIP1.9 | length 166.8
  Bottom Layer w10: C12.1 2058,4105 D2.2 2125,4172 HIP1.9
NetC14_1: C14.1 LM1.3 R22.1 R24.2 | length 390.3
  Bottom Layer w10: LM1.3 2605,4781 R24.2 2704,4849 R22.1 2818,4850 C14.1
NetC21_1: C21.1 TPS1.1 | length 170.2
  Bottom Layer w10: TPS1.1 2060,4875 C21.1@2209,4875
NetC21_2: C21.2 D5.2 L2.1 TPS1.8 | length 941.4
  Top Layer w10: v1(2273,4874) 2281,4874 2350,4805 2467,4805 D5.2 2582.52,4750.52 L2.1
  Bottom Layer w10: TPS1.8 2045,5075 2175,4945 2210,4945 2273,4882 v1(2273,4874)
NetHCPL1_2: HCPL1.2 R10.1 | length 87.7
  Top Layer w10: R10.1 1482,3925 HCPL1.2
NetHCPL1_3: HCPL1.3 R12.1 | length 132.5
  Top Layer w10: R12.1 1400,3795 1476,3871 HCPL1.3
NetHIP1_5: HIP1.5 R18.2 | length 98.7
  Bottom Layer w10: HIP1.5 2394,4390 R18.2
NetHIP1_10: HIP1.10 R15.2 | length 99.1
  Bottom Layer w10: R15.2 2115,4280 HIP1.10
NetHIP1_13: HIP1.13 R17.2 | length 548
  Bottom Layer w10: R17.2 1830,4245 1925,4340 2060,4340 2075,4355 2075,4410 2105,4440 HIP1.13
NetHIP1_14: HIP1.14 R16.1 | length 149
  Bottom Layer w10: R16.1 2035,4420 2105,4490 HIP1.14
NetHIP1_16: HIP1.16 R14.1 | length 123.1
  Bottom Layer w10: R14.1 2045,4670 HIP1.16
Netin1_1: in1.1 L1.2 LM1.1 | length 464
  Bottom Layer w10: v1@2630,4520 v1(2630,4522.5) 2630,4630 2608,4652 LM1.1 2650,4660 2760,4660 2795,4695 in1.1
NetLM1_4: LM1.4 R21.1 | length 189
  Bottom Layer w10: LM1.4 2867,4778 R21.1
NetLS2_2: LS2.2 Q1.3 | length 73.7
  Bottom Layer w10: Q1.3 LS2.2@1800,3563.43
  Bottom Layer w30: LS2.2 LS2.2@1800,3563.43
NetMOS1_1: MOS1.1 R15.1
  other v1: 1959,4280
NetMOS2_1: MOS2.1 R14.2
  other v1: 1974,4680
NetMOS3_1: MOS3.1 R17.1
  other v1: 1759,4105
NetMOS4_1: MOS4.1 R16.2 | length 239.6
  Top Layer w10: MOS4.1 1854,4500 v1(1964,4390)
NetNSSLED_1: NSSLED.1 R3.2
  other v1: 2861,3850
NetP3_1: CAN.1 R25.2 | length 478.5
  Bottom Layer w10: R25.2 1350,3945 1350,3615 CAN.1
NetQ1_1: Q1.1 R4.2 | length 511.5
  Bottom Layer w10: Q1.1 1900,3336 1900,3280 1930,3250 2195,3250 2220,3275 R4.2
NetR20_2: R20.2 VINLED.1
  other v1: 1205,5065
NetR27_1: R27.1 R28.2 TPS1.4 | length 205.4
  Bottom Layer w10: R28.2 R27.1 1830,4890 TPS1.4
NRST: *1.7 C8.2 R8.1 S1.1 SWD.5 | length 889.6
  Top Layer w10: *1.7 2196.89,3298.11 2259,3236 2516,3236 SWD.5 2695,3415 S1.1
  Bottom Layer w10: v1(2775,3415) 2811,3379 R8.1 2942,3379 C8.2
OSC32_IN: *1.3
OSC32_OUT: *1.4
OSCIN: *1.5 C1.2 R1.2 XT1.2 | length 1426.8
  Top Layer w10: *1.5 2157.52,3237.48 2200,3195 2845,3195 2880,3230 2880,3450 XT1.2@2995,3565 ; R1.2 v1(2855,3565) XT1.2@2995,3565 ; XT1.2 XT1.2@2995,3565
OSCOUT: *1.6 C3.2 R1.1 XT1.1 | length 1460
  Top Layer w10: *1.6@2174.52,3335 2174.52,3270.48 2225,3220 2775,3220 2835,3280 2835,3505 2790,3550 2790,3690 2820,3720 v1(2855,3720) ; R1.1 v1(2855,3720) ; XT1.1 2990,3720 v1(2855,3720)
PA2: *1.16
PA3: *1.17
PA4: *1.20
PA5: *1.21
PA8: *1.41
PA15: *1.50
PB0: *1.26
PB1: *1.27
PB3: *1.55
PB4: *1.56
PB5: *1.57
PB8: *1.61
PB12: *1.33 NSSLED.2 | length 443.9
  Top Layer w10: *1.33 v1(2424.05,3830) ; v1(2725,3830) 2769,3830 NSSLED.2
  Bottom Layer w10: v1(2424.05,3830) v1(2725,3830)
PB13: *1.34
PB14: *1.35
PC1: *1.9
PC3: *1.11
PC5: *1.25
PC6: *1.37
PC9: *1.40
PC10: *1.51
PC11: *1.52
PC12: *1.53
PC13: *1.2
PD2: *1.54
PGND: 5VLED.2 12VLED.2 ACS1.3 ACS1.4 ACS1.5 au1.6 C9.1 C11.1 C13.1 C15.1 C19.2 C20.1 C22.1 C23.1 C24.2 C25.2 C26.1 CV1.2 CV2.2 D5.1 HIP1.6 LM1.2 LS1.7 LS1.11 LS1.12 LS1.13 P2.2 P2.8 pad.24 Q1.2 R18.1 R24.1 R26.1 R28.1 R30.2 TPS1.6 TPS1.9 VINLED.2 | length 2919.5
  Top Layer w10: v1(1060,3590) 1205,3590 1300,3685 1497,3685 v1(1548,3736) ; C20.1 2599,4176 R26.1 2770,4231 2770,4260 2785,4275 2925,4275 2937.5,4262.5 2937.5,4247.5 2965,4220 2965,4040 au1.6
  Bottom Layer w10: P2.8 1060,3752.91 v1(1060,3590) 1060,3480 1130,3410 1225,3410 1276,3359 1276,3234 1315,3195 1685,3195 1705,3215 1705,3335 1710,3340 1710,3350 v1(1760,3400)
  Bottom Layer w80: P2.2@1133.24,4738.63 1135,4738.61 1134.96,4738.53 1281.43,4885
PWM2A: *1.38 as1.4 | length 200.3
  Top Layer w10: *1.38 2275.63,3825.63 as1.4
PWM2B: *1.39 as1.5 | length 167
  Top Layer w10: *1.39 2255.94,3905.94 as1.5
PWMA: *1.58 LS1.2 | length 1292.7
  Top Layer w10: v1(1898.47,3590) 1899.7,3590 1941,3548.7 1941,3547.47 1962.99,3525.47 *1.58
  Bottom Layer w10: v1(1898.47,3590) 1895,3590 1875,3610 1875,3750 1974,3849 1981.63,3849 2011,3878.37 2011,3901 2195,4085 2355,4085 2395,4125 2395,4230 2436.17,4271.17 2436.17,4293.51 2502.66,4360 LS1.2
PWMAIN: HIP1.4 LS1.3 | length 212.4
  Bottom Layer w10: HIP1.4 2450,4440 2480,4410 LS1.3
PWMB: *1.59 LS1.5 | length 1566.1
  Top Layer w10: v1(1920,3540) 1954.21,3505.79 *1.59
  Bottom Layer w10: v1(1920,3540) 1920,3620 1895,3645 1895,3740 1988,3833 1988.25,3833 2027,3871.75 2027,3872 2215,4060 2355,4060 2415,4120 2415,4165 2430,4180 2510,4180 2600,4270 2600,4500 2590,4510 LS1.5
PWMBIN: HIP1.3 LS1.6 | length 229
  Bottom Layer w10: HIP1.3 2375,4490 2445,4560 LS1.6
RING: *1.8 R4.1 | length 114
  Top Layer w10: *1.8@2215,3331.57 *1.8 2216.57,3403.43 v1(2215,3405)
  Bottom Layer w10: v1(2215,3405) 2220,3400 R4.1
RXD: *1.43 BLUETOOTH1.4 | length 924.1
  Top Layer w10: BLUETOOTH1.4 1645,3295 1720,3370 1720,3575 1790,3645 v1(1945,3645) ; v1(2175,3720) 2175,3777.8 *1.43
  Bottom Layer w10: v1(1945,3645) 1955,3635 2105,3635 2175,3705 v1(2175,3720)
S_A: P2.6 R10.2 | length 328.4
  Top Layer w10: P2.6 1271,4125 R10.2
S_B: P2.7 R12.2 | length 324.9
  Top Layer w10: P2.7 1245.46,3851 R12.2
SPEED2_A: *1.22 as1.2 | length 522.3
  Top Layer w10: *1.22 2515.79,3505.79 2565,3555 2565,3915 as1.2
SPEED2_B: *1.23 as1.1 | length 684.8
  Top Layer w10: *1.23 2500.47,3525.47 2530,3555 2530,3965 2550,3985 2635,3985 as1.1
SPEED_A: *1.14 HCPL1.7 R11.2 | length 1841.8
  Top Layer w10: R11.2 1761,3921 HCPL1.7 1666,3921 1590,3845 1590,3680 1530,3620 1530,3425 1495,3390 1495,3255 1560,3190 v1(2090,3190) ; *1.14 2337.37,3327.31 2337.37,3277.63 v1(2345,3270)
  Bottom Layer w10: v1(2090,3190) 2105,3190 2135,3220 2310,3220 2345,3255 v1(2345,3270)
SPEED_B: *1.15 HCPL1.6 R13.2 | length 1747.1
  Top Layer w10: R13.2 1738,3871 HCPL1.6 1661,3871 1630,3840 1630,3795 1670,3755 1670,3480 1590,3400 1590,3260 1630,3220 2125,3220 v1(2155,3190) ; *1.15 2357.05,3327.32 2357.05,3292.95 v1(2380,3270)
  Bottom Layer w10: v1(2155,3190) 2315,3190 2380,3255 v1(2380,3270)
SWCLK: *1.49 R9.2 SWD.3 | length 767.6
  Top Layer w10: v1(1950,3705) 1999.05,3705 *1.49 2052.36,3702.64 2135,3620 v1(2135,3600)
  Bottom Layer w10: v1(2135,3600) 2140,3605 2152,3593 2434.56,3593 2505.56,3593 2507.56,3595 2605,3595 SWD.3
SWDIO: *1.46 R7.1 SWD.2 | length 711.6
  Top Layer w10: v1(2105,3845) 2105,3825 2118.15,3811.85 *1.46 2118.15,3751.55 2125,3744.7 2125,3725 2160,3690 2185,3690 2210,3665 v1(2220,3665)
  Bottom Layer w10: R7.1 2110,3821 2105,3826 v1(2105,3845) ; v1(2220,3665) 2235,3650 2630,3650 SWD.2
TXD: *1.42 BLUETOOTH1.5 | length 855.3
  Top Layer w10: BLUETOOTH1.5@1755,3265 1755,3275 BLUETOOTH1.5 1845,3375 1845,3525 1855,3535 1855,3595 1872.53,3612.53 1942.47,3612.53 v1(1945,3610) ; *1.42 2199.57,3777.32 2199.57,3713.05 v1(2202.63,3710)
  Bottom Layer w10: v1(1945,3610) 2102.63,3610 v1(2202.63,3710)
VI: ACS1.1 ACS1.2 MOS3.3 MOS4.3 pad.18 pad.19 | length 796.8
  Bottom Layer w20: ACS1.2 ACS1.1 1585,4870
  Bottom Layer w80: 1565,4890 1585,4870 pad.18 pad.19
VIF: *1.10 F/O.2 R29.2 R30.1 | length 1368.6
  Top Layer w10: F/O.2 1905,3875 2253.26,3526.74 2253.26,3332.68 *1.10
  Bottom Layer w10: R30.1 R29.2 1570,4110 1630,4050 1810,4050 F/O.2
VIF2: *1.24 as1.6 | length 576.6
  Top Layer w10: v1(2270,3720) 2270,3600 2327.53,3542.47 2448.73,3542.47 *1.24
  Bottom Layer w10: as1.6 2185,3805 v1(2270,3720)
VIN: C22.2 CV1.1 CV2.1 MOS1.4 MOS2.4 P2.1 R20.1 TPS1.7 | length 3386.5
  Top Layer w10: P2.1 1126.76,4892.72 P2.1@1137.28,4892.72 ; MOS1.4@2230,4195 MOS1.4
  Top Layer w30: P2.1@1126.76,4892.72 1239.04,5005 1460,5005 1650,5195 2035,5195 CV2.1@2125,5105
  Top Layer w80: P2.1@1137.28,4892.72 1245,4785 2160,4785 2230,4715 MOS2.4 MOS1.4@2230,4195
  Bottom Layer w10: P2.1 1125,5056 R20.1
  Bottom Layer w30: TPS1.7 1995,5140 2025,5170 2070,5170 CV2.1 2197,5043 C22.2
VIO: ACS1.7 F/O.1 R29.1 | length 2386.3
  Bottom Layer w10: ACS1.7 1475,5245 1440,5280 1330,5280 1280,5230 1280,5170 1240,5130 1120,5130 1055,5065 1055,4705 1085,4675 1180,4675 1570,4285 R29.1 1695,4250 1790,4155 1790,4075 1799,4066 1854,4066 1965,3955 F/O.1
pads on no net: au1.2 au1.4 au1.5 BLUETOOTH1.1 BLUETOOTH1.6 TJA1.5 TPS1.2 TPS1.3 TPS1.5 U1.4

## Polygon pours and split planes (outlines as drawn)
PGND on Top Layer "Top Layer-PGND" (solid, remove dead copper, pour order 98): 685,2975 710,3000 3525,3000 3525,5975 3470,5920 475,5920
GND on Top Layer "Top Layer-GND" (solid, remove dead copper, pour order 92): 1480,3145 1425,3200 1425,4060 1460,4095 1485,4070 2275,4070 2275,4100 2505,4330 2935,4330 2935,4025 3190,3770 3190,3110
PGND on Bottom Layer (solid, remove dead copper, pour order 96): 770,3030 3610,3030 3715,3135 3240,3610 3240,5570 700,5570 540,5730
GND on Bottom Layer (solid, remove dead copper, pour order 94): 1415,3100 1415,4065 1430,4080 1435,4075 2360,4075 2360,4195 2480,4315 2945,4315 2960,4330 2965,4325 2965,4040 3170,3835 3170,3100

## Keep-outs
Keep-Out Layer:
  lines w10: 1030,3250 1030,5165 ; 1030,3275 ccw(c1131.51,3266.23) 1165,3170 ; 1030,5155 cw(c1195,5165) 1185,5330 ; 1130,3165 3000,3165 ccw(c2995,3280) 3110,3285 ; 1175,5330 2975,5330 cw(c2970,5190) 3110,5185 ; 3110,3275 3110,5180

## Other copper
Bottom Layer:
  rectangle net VI: 1465,4855 1550,4925
  rectangle net PGND: 1281.43,4850 1435,4920

## Silkscreen, mask and mechanical layers (free items; w line width, h text height)
Top Overlay:
  text "VIN" at 1255,4930 h30 r270
  text "PGND" at 1250,4740 h30 r270
  text "M+" at 1260,4540 h30 r270
  text "12V" at 3090,4510 h30 r90
  text "M-" at 1285,4460 h30 r270
  text "5V" at 3090,4320 h30 r90
  text "5V" at 1260,4295 h30 r270
  text "A" at 1260,4130 h30 r270
  text "F2" at 2150,4000 h30
  text "M2B" at 2240,4000 h30
  text "M2A" at 2350,4000 h30
  text "DI2" at 2455,4000 h30
  text "S2A" at 2555,4000 h30
  text "S2B" at 2655,4000 h30
  text "B" at 1260,3980 h30 r270
  text "PGND" at 3085,3980 h30 r90
  text "PGND" at 1260,3865 h30 r270
  text "3V3" at 2728.54,3725 h30 r90
  text "C_H" at 1265,3705 h30 r270
  text "DIO" at 2728.54,3619.75 h30 r90
  text "H" at 1450,3545 h30
  text "C_L" at 1265,3525 h30 r270
  text "CLK" at 2728.54,3515 h30 r90
  text "L" at 1460,3440 h30
  text "GND" at 2728.54,3405 h30 r90
  text "NRS" at 2730,3280 h30 r90
  text "5V" at 1420,3190 h30
  text "GND" at 1510,3190 h30
  text "R" at 1645,3190 h30
  text "T" at 1750,3190 h30
  text "Brush_Driver2018V1.2.3cY" at 2155,3190 h30
Bottom Overlay:
  text "VIN" at 1255,4940 h30 r270
  text "PGND" at 1240,4665 h30 r270
  text "12V" at 3090,4585 h30 r90
  text "M+" at 1240,4570 h30 r270
  text "M-" at 1240,4400 h30 r270
  text "5V" at 3090,4370 h30 r90
  text "A" at 1725,4365 h200
  text "5V" at 1240,4245 h30 r270
  text "A" at 1240,4130 h30 r270
  text "PGND" at 3085,4090 h30 r90
  text "F2" at 2195,4000 h30
  text "M2B" at 2320,4000 h30
  text "M2A" at 2430,4000 h30
  text "DI2" at 2530,4000 h30
  text "S2A" at 2635,4000 h30
  text "S2B" at 2735,4000 h30
  text "B" at 1240,3960 h30 r270
  text "3V3" at 2728.54,3805 h30 r90
  text "PGND" at 1240,3755 h30 r270
  text "DIO" at 2728.54,3694.75 h30 r90
  text "C_H" at 1245,3625 h30 r270
  text "CLK" at 2728.54,3595 h30 r90
  text "H" at 1450,3545 h30
  text "GND" at 2728.54,3485 h30 r90
  text "C_L" at 1245,3445 h30 r270
  text "L" at 1480,3440 h30
  text "NRS" at 2730,3355 h30 r90
  text "Brush_Driver2018V1.2.3cY" at 2850,3195 h30
  text "5V" at 1470,3190 h30
  text "GND" at 1590,3190 h30
  text "R" at 1665,3190 h30
  text "T" at 1730,3190 h30
Top Solder:
  lines w10: 1210,4430 1210,4435 1205.83,4435 1215.83,4425 ; 1524.37,4585.63 1528.74,4590 ; 2170,4775 2170,4795 ; 2180,4750 2180,4785 ; 2180,4755 2180,4765 ; 1875,4195 1885,4195 1893,4195 1875,4195
  lines w70: 1125,4432.09 1162.91,4435 1205.83,4435 1405.83,4235 ; 1125,4585.63 1524.37,4585.63 ; 1137.28,4892.72 1245,4785 2160,4785 2180,4765 ; 1470,4195 1875,4195 ; 1528.74,4590 1890,4590 1970,4510 ; 1885,4195 1979,4101 1987,4101 ; 2170,4775 2260,4685 ; 2230,4250 2230,4585
  lines w80: 1125,4892.72 1137.28,4892.72 ; 1405.83,4235 1420,4235
Bottom Solder:
  rectangle: 1475,4860 1520,4915
  rectangle: 1370,4875 1425,4925
  rectangle: 1420,4875 1425,4885
  lines w60: 1495,4890 1565,4890
  lines w70: 1565,4890 1770,4685 1770,4290
  lines w80: 1125,4739.17 1139.17,4739.17 1285,4885 1380,4885